# Altium PCB led.PcbDoc
Units mm, origin at the board's own origin, x right, y up, seen from the top; angles counter-clockwise.
Board outline 50 x 50 mm, 2 copper layers (Top Layer, Bottom Layer); 46 components, 67 nets, 189 pads, 19 vias.
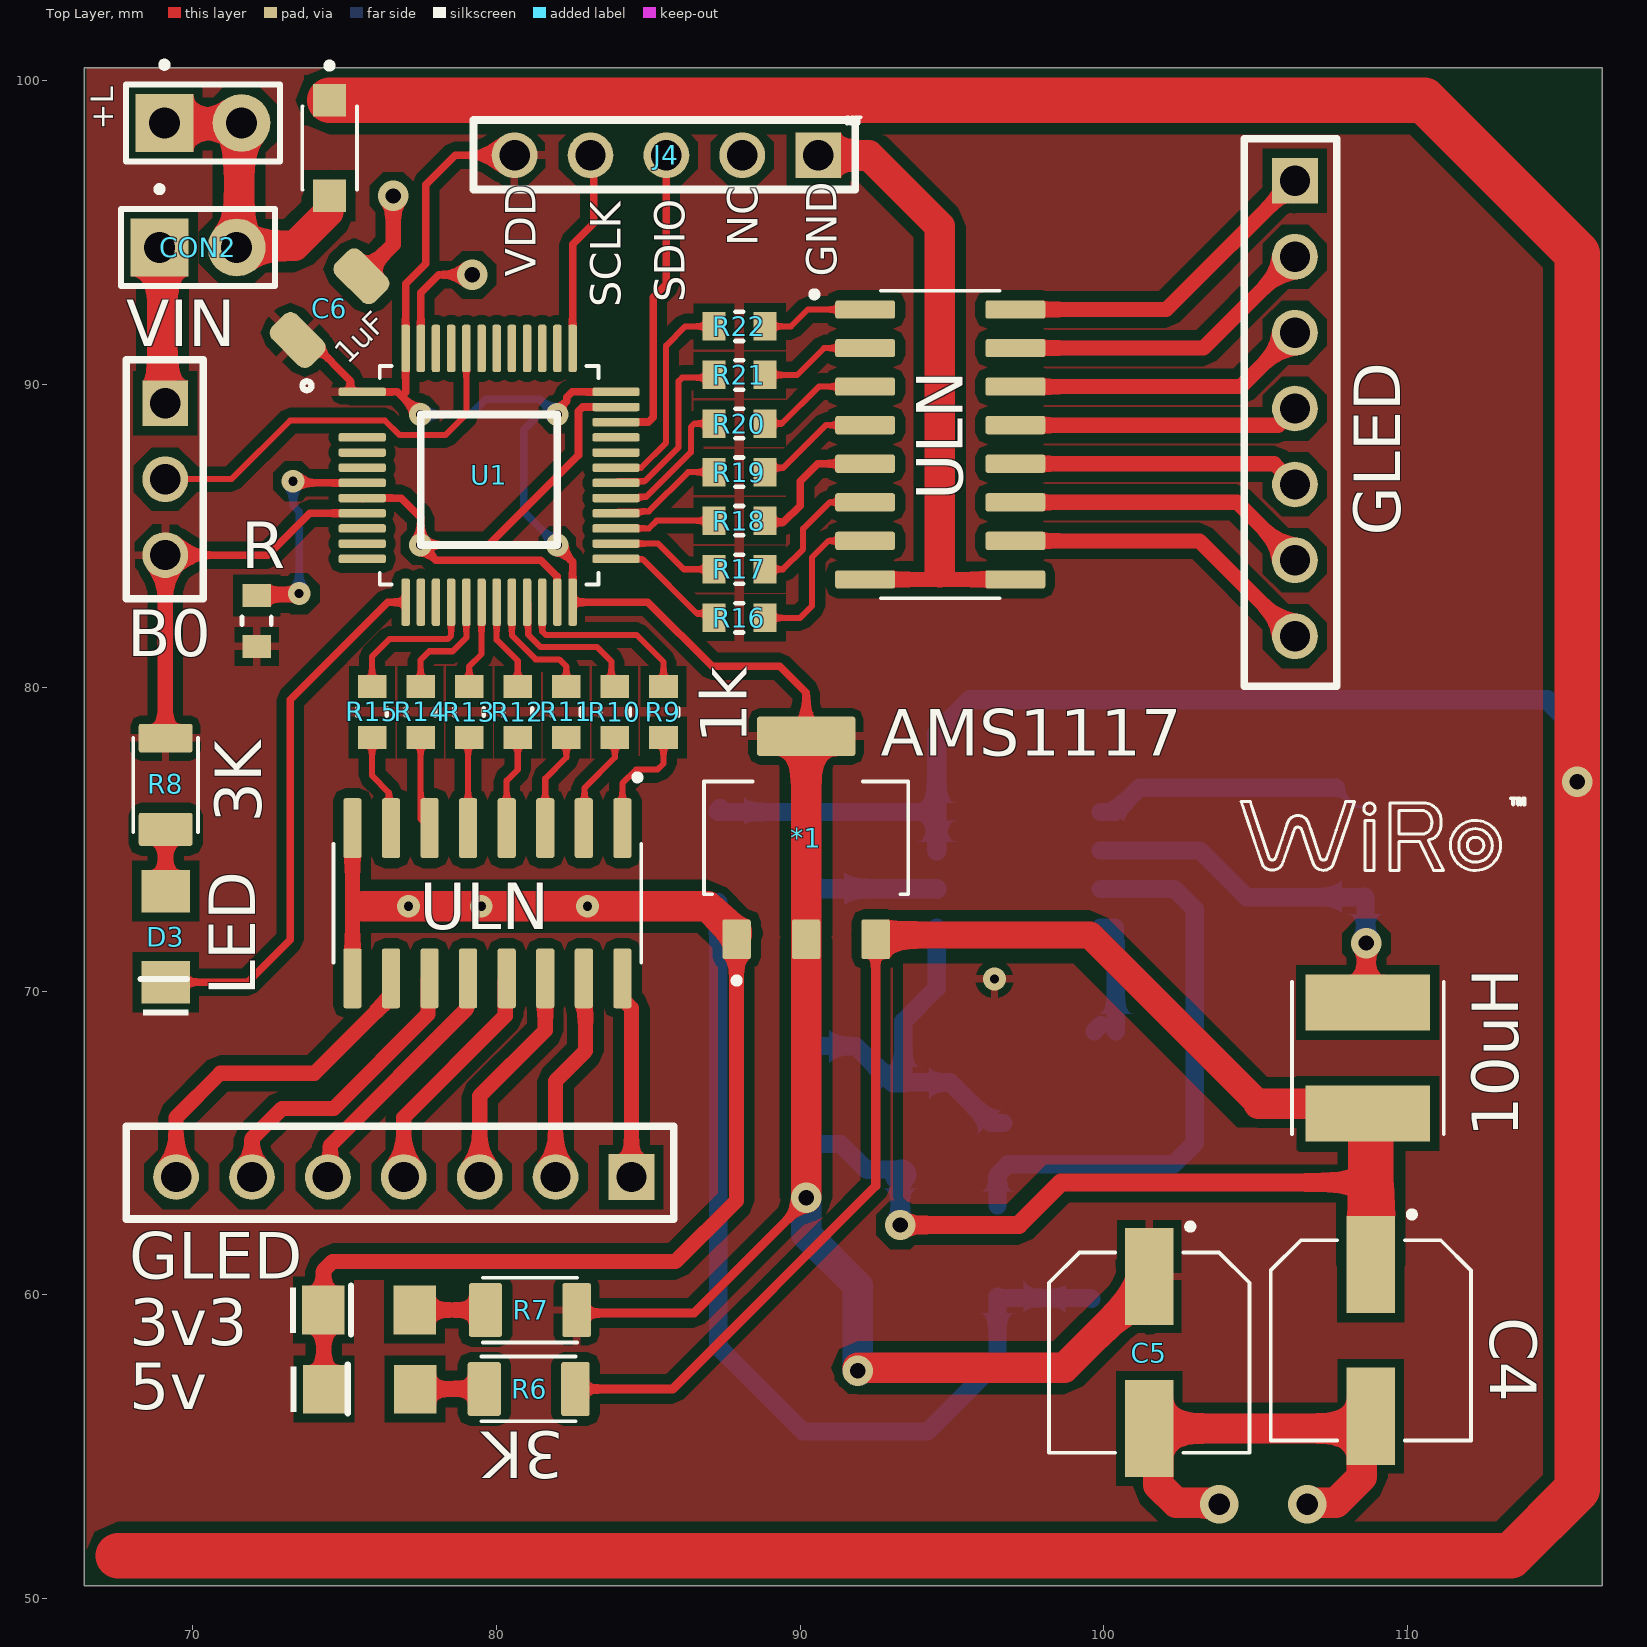
[diagram p0: Top Layer view]
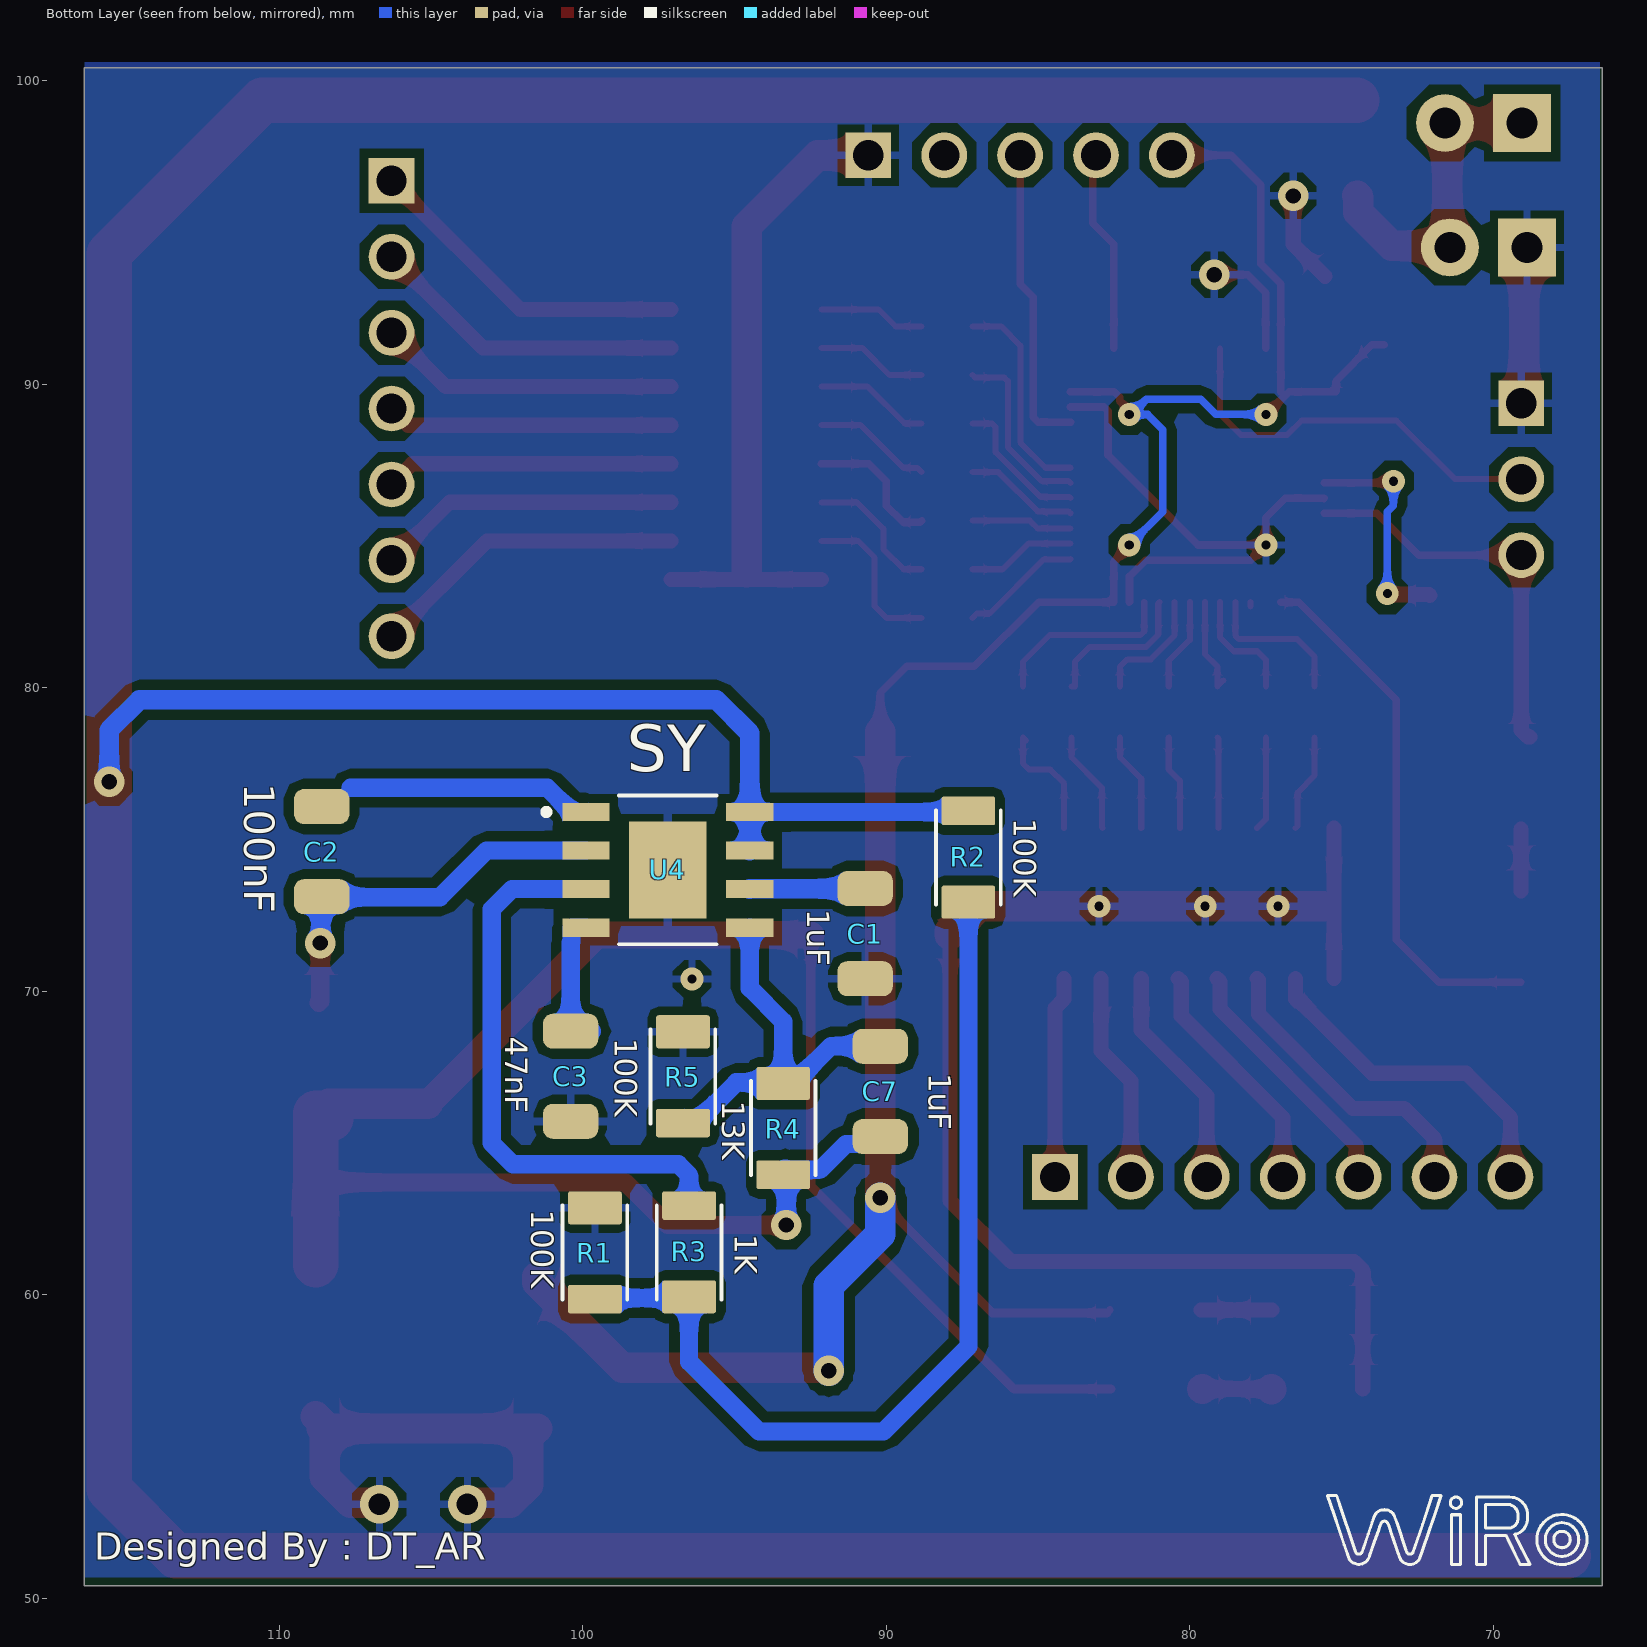
[diagram p1: Bottom Layer view, seen from below]
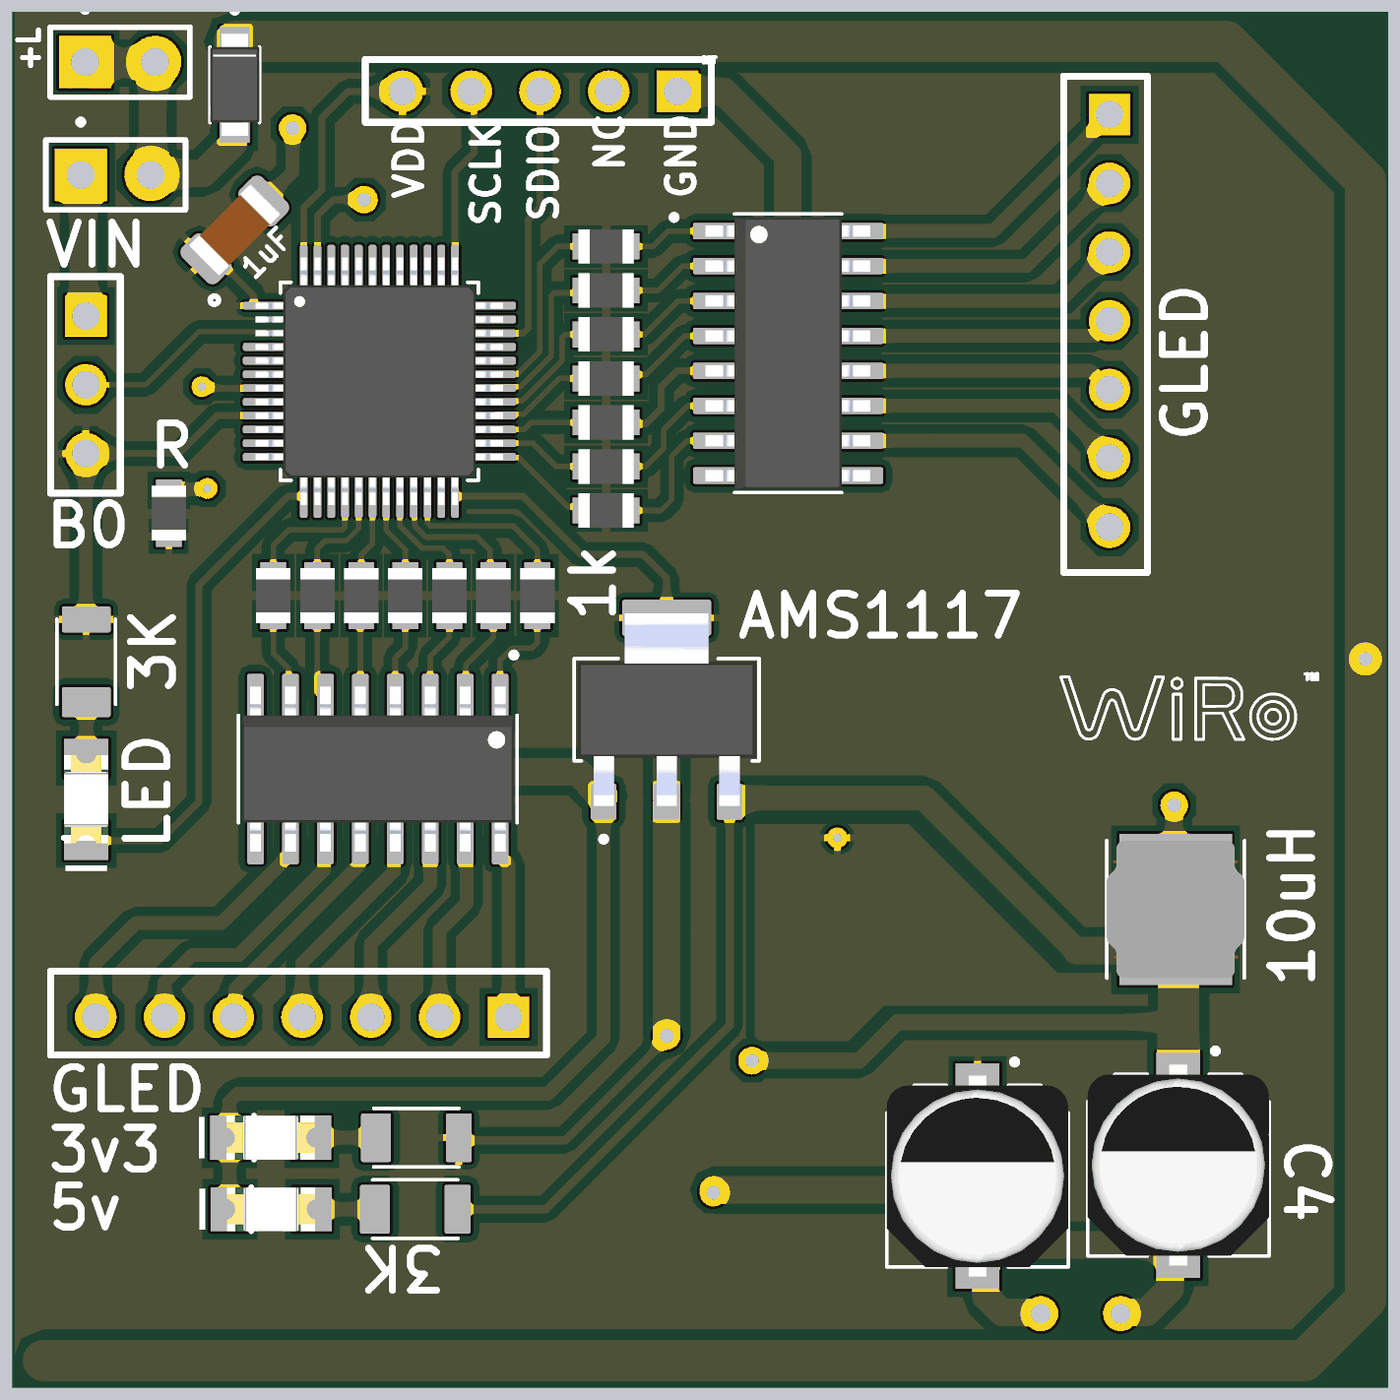
[diagram p2: 3D render of the assembled board from above, using the file's embedded part models]

## Layer stack, top to bottom
Top Solder: solder mask 0.0102, Solder Resist, Dk 3.5
Top Layer: signal copper 0.0356
Dielectric 1: dielectric 0.32, FR-4, Dk 4.8
Bottom Layer: signal copper 0.0356
Bottom Solder: solder mask 0.0102, Solder Resist, Dk 3.5

## Board outline
66.421,50.419 66.421,100.419 116.421,100.419 116.421,50.419

## Design rules (kind name [scope] priority, off if disabled: settings)
Clearance [All] p1: gap=0.2 ignorepadtopadclearanceinfootprint=FALSE
PolygonConnect [All] p1: connectstyle=Relief reliefconductorwidth=0.254 reliefentries=4 polygonreliefangle="90 Angle" airgapwidth=0.254
RoutingVias [All] p1: holewidth=0.711 width=1.27 viastyle="Through Hole" minholewidth=0.711 minwidth=1.27 maxholewidth=0.711 maxwidth=1.27
SolderMaskExpansion [All] p1: expansion=0.102 istentingtop=FALSE
Width [All] p1: maxlimit=1.5 minlimit=0.2 preferedwidth=0.25
30 further rules are at their usual default settings.

## Classes and differential pairs
component class Led: 3v3 5v 10uH *1 +L B0 C1 C2 C3 C4 C5 C6 CON2 D3 GLED J4 R R1 R2 R3 R4 R5 R6 R7 R8 R9 R10 R11 R12 R13 R14 R15 R16 R17 R18 R19 R20 R21 R22 U1 U4 ULN VIN

## Components (designator, comment, footprint, x,y, rotation, side; value= is the part's Value field where it differs from the comment)
3v3 "Super Red, 1.9V, 140°" WL-SMCW_1206_150120xx75000 75.8,59.5 r0 top (schematic designator D2)
5v "Super Red, 1.9V, 140°" WL-SMCW_1206_150120xx75000 75.819,56.896 r0 top (schematic designator D1)
10uH "Lout" IND_LQH5BPB100MT0L 108.7,67.8 r270 top (schematic designator L1)
*1 "AMS1117" SOT229P700X180-4N 90.2,75.055 r90 top
+L "CON?" PCBComponent_1#1 72.87,99.87 r180 top (schematic designator CON3)
B0 "Boot0" PCBComponent_1#2 69.088,86.868 r90 top (schematic designator J3)
C1 "Cvcc" CAP3216X125N 90.7,71.9 r270 bottom
C2 "Cbs" CAP3216X125N 108.6,74.6 r270 bottom
C3 "Css" CAP3216X125N 100.4,67.2 r270 bottom
C4 "cap3.3v" CAP_EEEFPA221XAL 108.8,58.5 r270 top
C5 "cap3.3v" CAP_EEEFPA221XAL 101.5,58.1 r270 top
C6 "Cm" CAP3216X125N 74.5,92.5 r45 top
C7 "CFB" CAP3216X125N 90.2,66.7 r90 bottom
CON2 "CON?" PCBComponent_1#1 72.71,95.77 r180 top
D3 "Super Red, 1.9V, 140°" WL-SMCW_1206_150120xx75000 69.1,71.8 r90 top
GLED "B7B-XH-A" PCBComponent_1#3 106.299,89.194 r90 top (schematic designator J1)
GLED "B7B-XH-A" PCBComponent_1#3 76.945,63.881 r0 top (schematic designator J2)
J4 "SWD" PCBComponent_1#4 85.595,97.536 r0 top
R "4-2176245-2" PCBComponent_1#5 72.1,82.2 r90 top (schematic designator R23)
R1 "4-2176245-2" RESC3115X65N 99.6,61.4 r270 bottom
R2 "4-2176245-2" RESC3115X65N 87.3,74.4 r90 bottom
R3 "4-2176245-2" RESC3115X65N 96.5,61.4 r90 bottom
R4 "Rfb" RESC3115X65N 93.4,65.5 r270 bottom
R5 "Rpd" RESC3115X65N 96.7,67.2 r270 bottom
R6 "Rled" RESC3115X65N 81.06,56.9 r0 top
R7 "Rled" RESC3115X65N 81.1,59.5 r0 top
R8 "4-2176245-2" RESC3115X65N 69.1,76.8 r90 top
R9 "4-2176245-2" PCBComponent_1#5 85.5,79.2 r90 top
R10 "4-2176245-2" PCBComponent_1#5 83.9,79.2 r90 top
R11 "4-2176245-2" PCBComponent_1#5 82.3,79.2 r90 top
R12 "4-2176245-2" PCBComponent_1#5 80.7,79.2 r90 top
R13 "4-2176245-2" PCBComponent_1#5 79.1,79.2 r90 top
R14 "4-2176245-2" PCBComponent_1#5 77.5,79.2 r90 top
R15 "4-2176245-2" PCBComponent_1#5 75.9,79.2 r90 top
R16 "4-2176245-2" PCBComponent_1#5 88,82.3 r180 top
R17 "4-2176245-2" PCBComponent_1#5 88,83.9 r180 top
R18 "4-2176245-2" PCBComponent_1#5 88,85.5 r180 top
R19 "4-2176245-2" PCBComponent_1#5 88,87.1 r180 top
R20 "4-2176245-2" PCBComponent_1#5 88,88.7 r180 top
R21 "4-2176245-2" PCBComponent_1#5 88,90.3 r180 top
R22 "4-2176245-2" PCBComponent_1#5 88,91.9 r180 top
U1 "STM32F103C8T6" QFP50P900X900X160-48N 79.756,86.995 r0 top
U4 "SY8205FCC" VREG_SY8205FCC 97.2,74 r180 bottom
ULN "ULN2003AD" SOIC127P600X175-16N 79.7,72.9 r270 top (schematic designator U3)
ULN "ULN2003AD" SOIC127P600X175-16N 94.615,88.011 r0 top (schematic designator U2)
VIN "SS34LW" SODFL3718X102N 74.5,97.775 r270 top (schematic designator D4)

## Footprints (in the part's own frame and the unit in brackets; to place one, negate y for a bottom-side part, rotate by r counter-clockwise, add the part's x,y. Pads: shape width x height; smd on the part's side, far side on the other; paste and mask are expansions set on the pad)
CAP3216X125N [mm]
  rrect54% 1.15x1.82 smd: 1(-1.485,0) 2(1.485,0)
  body extent -1.6,-0.8 1.6,0.8, height 1.8
CAP_EEEFPA221XAL [mm]
  rect 3.2x1.6 smd: 1(-2.5,0) 2(2.5,0)
  silkscreen extent -4.25,-3.3 3.3,3.3, body extent -3.65,-3.3 3.65,3.3, height 7.7
IND_LQH5BPB100MT0L [mm]
  rect 1.85x4.1 smd: 1(-1.825,0) 2(1.825,0)
  silkscreen extent -2.5,-2.5 2.5,2.5, body extent -2.5,-2.5 2.5,2.5, height 2.2
PCBComponent_1#1 [mm]
  rect 1.905x1.905 hole 1.02: 1(3.81,1.27)
  round 1.905 hole 1.02: 2(1.27,1.27)
  silkscreen extent 0,-0.75 5.08,2.54
PCBComponent_1#2 [mm]
  rect 1.508x1.508 / inner round 1.508 / far side rect 1.508x1.508 hole 1: 1(2.5,0)
  round 1.508 hole 1: 2(0,0) 3(-2.5,0)
  silkscreen extent -3.94,-1.25 3.94,1.29
PCBComponent_1#3 [mm]
  rect 1.508x1.508 / inner round 1.508 / far side rect 1.508x1.508 hole 1: 1(7.5,0)
  round 1.508 hole 1: 2(5,0) 3(2.5,0) 4(0,0) 5(-2.5,0) 6(-5,0) 7(-7.5,0)
  silkscreen extent -9.14,-1.38 8.89,1.67
PCBComponent_1#4 [mm]
  rect 1.508x1.508 / inner round 1.508 / far side rect 1.508x1.508 hole 1: 1(5,0)
  round 1.508 hole 1: 2(2.5,0) 3(0,0) 4(-2.5,0) 5(-5,0)
  silkscreen extent -6.35,-1.13 6.22,1.16
PCBComponent_1#5 [mm]
  rect 0.762x0.94 smd: 1(-0.838,0) 2(0.838,0)
  silkscreen extent -0.13,-0.48 0.13,0.48, body extent -1,-0.63 1,0.63, height 0.65
QFP50P900X900X160-48N [mm]
  rrect50% 1.56x0.28 smd: 1(-4.18,2.75) 4(-4.18,1.25) 5(-4.18,0.75) 6(-4.18,0.25) 7(-4.18,-0.25) 8(-4.18,-0.75) 9(-4.18,-1.25) 10(-4.18,-1.75) 11(-4.18,-2.25) 12(-4.18,-2.75) 25(4.18,-2.75) 26(4.18,-2.25) 27(4.18,-1.75) 28(4.18,-1.25) 29(4.18,-0.75) 30(4.18,-0.25) 31(4.18,0.25) 32(4.18,0.75) 33(4.18,1.25) 34(4.18,1.75) 35(4.18,2.25) 36(4.18,2.75)
  rrect50% 1.56x0.28 on Mech16: 2(-4.18,2.25) 3(-4.18,1.75)
  rrect50% 0.28x1.56 smd: 13(-2.75,-4.18) 14(-2.25,-4.18) 15(-1.75,-4.18) 16(-1.25,-4.18) 17(-0.75,-4.18) 18(-0.25,-4.18) 19(0.25,-4.18) 20(0.75,-4.18) 21(1.25,-4.18) 22(1.75,-4.18) 23(2.25,-4.18) 24(2.75,-4.18) 37(2.75,4.18) 38(2.25,4.18) 39(1.75,4.18) 40(1.25,4.18) 41(0.75,4.18) 42(0.25,4.18) 43(-0.25,4.18) 44(-0.75,4.18) 45(-1.25,4.18) 46(-1.75,4.18) 47(-2.25,4.18) 48(-2.75,4.18)
  silkscreen extent -6.15,-3.6 3.6,3.6, body extent -4.5,-4.5 4.5,4.5, height 1.6
RESC3115X65N [mm]
  rrect14% 1.09x1.77 smd: 1(-1.465,0)
  rrect14% 0.94x1.77 smd: 2(1.54,0)
  silkscreen extent -1.55,-1.06 1.55,1.06
SODFL3718X102N [mm]
  rect 1.08x1.09 smd: A(1.575,0) C(-1.575,0)
  silkscreen extent -2.81,-0.9 1.38,0.9, body extent -1.85,-0.9 1.85,0.9, height 1.02
SOIC127P600X175-16N [mm]
  rrect25% 1.97x0.6 smd: 1(-2.475,4.445) 2(-2.475,3.175) 3(-2.475,1.905) 4(-2.475,0.635) 5(-2.475,-0.635) 6(-2.475,-1.905) 7(-2.475,-3.175) 8(-2.475,-4.445) 9(2.475,-4.445) 10(2.475,-3.175) 11(2.475,-1.905) 12(2.475,-0.635) 13(2.475,0.635) 14(2.475,1.905) 15(2.475,3.175) 16(2.475,4.445)
  silkscreen extent -4.24,-5.06 1.95,5.06, body extent -3,-4.95 3,4.95, height 1.75
SOT229P700X180-4N [mm]
  rrect15% 1.31x0.93 smd: 1(-3.345,2.29) 2(-3.345,0) 3(-3.345,-2.29)
  rrect15% 1.31x3.24 smd: 4(3.345,0)
  silkscreen extent -4.8,-3.36 1.86,3.36, body extent -3.5,-3.25 3.5,3.25, height 1.8
VREG_SY8205FCC [mm]
  rect 1.55x0.6 smd: 1(-2.7,1.905) 2(-2.7,0.635) 3(-2.7,-0.635) 4(-2.7,-1.905) 5(2.7,-1.905) 6(2.7,-0.635) 7(2.7,0.635) 8(2.7,1.905)
  rect 2.55x3.2 smd paste-3: 9(0,0)
  silkscreen extent -4.1,-2.45 1.61,2.45
WL-SMCW_1206_150120xx75000 [mm] "SMD Mono-color Chip LED, body 3.2x1.6mm"
  rect 1.4x1.6 smd: 1(-1.5,0) 2(1.5,0)
  silkscreen extent -2.6,-0.75 -2.4,0.75, body extent -1.6,-0.8 1.6,0.8, height 0.68

## Part data
3v3 5v D3: library part 150120SS75000, "WL-SMCW Mono-color Chip LED Waterclear, SMT, size 1206, Super Red, 1.9V, 140°", Case/Size Code=1206, Emitting Color="Super Red", Forward Voltage=1.9V, Manufacturer="Wurth Elektronik", Operating Temperature Max=85°C, Operating Temperature Min=-40°C, Category="Signal LEDs", Chip Technology=AlInGaP, ComponentLink1Description="Website Link", ComponentLink1URL=https://www.we-online.com/redexpert/article/150120SS75000?ad, ComponentLink2Description="Datasheet Link", ComponentLink2URL=https://www.we-online.com/redexpert/spec/150120SS75000?ad, Dominant Wavelength=630nm, Height=0.68mm, Length=3.2mm, Luminous Intensity=60mcd, Manufacturer Part Number=150120SS75000, Match Code=WL-SMCW, Mount="Surface Mount", Packaging="Tape and Reel", Peak Wavelength=645nm, Viewing Angle=140°, Width=1.6mm
10uH: library part LQH5BPB100MT0L, "Inductor with Inductance: 10uH Tol. +/-20%, Package: 2020 (5050)", Package=NONSTANDARD, Check_prices=https://www.snapeda.com/parts/LQH5BPB100MT0L/Murata/view-part/4547622/?ref=eda, Digi-Key_Part_Number=490-9930-1-ND, MF=Murata, MP=LQH5BPB100MT0L, Purchase-URL=https://pricing.snapeda.com/search/part/LQH5BPB100MT0L/?ref=eda, SnapEDA_Link=https://www.snapeda.com/parts/LQH5BPB100MT0L/Murata/view-part/4547622/?ref=snap
B0: library part B3B-XH-A, "Connector Header Through Hole 3 position 0.098 (2.50mm)", Package=None, Check_prices=https://www.snapeda.com/parts/B3B-XH-A/JST+Sales+America+Inc./view-part/?ref=eda, MF="JST Sales", MP=B3B-XH-A, SnapEDA_Link=https://www.snapeda.com/parts/B3B-XH-A/JST+Sales+America+Inc./view-part/?ref=snap
C1: library part GRM31CR71H475KA12L, "1uF", Package=None, Availability=Unavailable, MP=GRM31CR71H475KA12L, Price=None
C2: library part GRM31CR71H475KA12L, "100nF", Package=None, Availability=Unavailable, MP=GRM31CR71H475KA12L, Price=None
C3: library part GRM31CR71H475KA12L, "47nF", Package=None, Availability=Unavailable, MP=GRM31CR71H475KA12L, Price=None
C4 C5: library part EEEFPA221XAL, "Aluminum Electrolytic Capacitors - SMD 10VDC 220uF 20% 6x8mm AEC-Q200", Package="RADIAL-2 Panasonic", Availability="In Stock", Check_prices=https://www.snapeda.com/parts/EEE-FPA221XAL/Panasonic/view-part/6178333/?ref=eda, MF=Panasonic, MP=EEE-FPA221XAL, Price=None, Purchase-URL=https://pricing.snapeda.com/search/part/EEE-FPA221XAL/?ref=eda, SnapEDA_Link=https://www.snapeda.com/parts/EEE-FPA221XAL/Panasonic/view-part/6178333/?ref=snap
C6: library part GRM31CR71H475KA12L, "CAP 4.7UF 50VDC X7R 10% SMD 1206", Package=None, Availability=Unavailable, MP=GRM31CR71H475KA12L, Price=None
C7: library part GRM31CR71H475KA12L, "OPTIONAL 1uF", Package=None, Availability=Unavailable, MP=GRM31CR71H475KA12L, Price=None
GLED GLED: "Connector Header Through Hole 7 position 0.098 (2.50mm)", Package=None, Check_prices=https://www.snapeda.com/parts/B7B-XH-A/JST+Sales+America+Inc./view-part/?ref=eda, MF="JST Sales", MP=B7B-XH-A, SnapEDA_Link=https://www.snapeda.com/parts/B7B-XH-A/JST+Sales+America+Inc./view-part/?ref=snap
J4: library part B5B-XH-A, "Connector Header Through Hole 5 position 0.098 (2.50mm)", Package=None, Check_prices=https://www.snapeda.com/parts/B5B-XH-A/JST+Sales+America+Inc./view-part/?ref=eda, MF="JST Sales", MP=B5B-XH-A, SnapEDA_Link=https://www.snapeda.com/parts/B5B-XH-A/JST+Sales+America+Inc./view-part/?ref=snap
R R8 R9 R10 R11 R12 R13 R14 R15 R16 R17 R18 R19 R20 R21 R22: "CRGS1206 5% 2K7", Package=None, Availability=Unavailable, MP=4-2176245-2, Price=None
R1 R2: "100K", Package=None, Availability=Unavailable, MP=4-2176245-2, Price=None
R3: "1K", Package=None, Availability=Unavailable, MP=4-2176245-2, Price=None
R4 R6 R7: library part 4-2176245-2, "CRGS1206 5% 2K7", Package=None, Availability=Unavailable, MP=4-2176245-2, Price=None
R5: library part 4-2176245-2, Package=None, Availability=Unavailable, MP=4-2176245-2, Price=None
U1: "ARM® Cortex®-M3 STM32F1 Microcontroller IC 32-Bit 72MHz 64KB (64K x 8) FLASH 48-LQFP (7x7)", Package="LQFP-48 STMicroelectronics", Check_prices=https://www.snapeda.com/parts/STM32F103C8T6/STMicroelectronics/view-part/?ref=eda, MF=STMicroelectronics, MP=STM32F103C8T6, SnapEDA_Link=https://www.snapeda.com/parts/STM32F103C8T6/STMicroelectronics/view-part/?ref=snap
U4: "High-Efficiency Fast Responseï¼Œ5A, 30V Input Synchronous Step Down Regulator", Package=Package, Check_prices=https://www.snapeda.com/parts/SY8205FCC/Silergy/view-part/?ref=eda, MF=Silergy, MP=SY8205FCC, SnapEDA_Link=https://www.snapeda.com/parts/SY8205FCC/Silergy/view-part/?ref=snap
ULN ULN: "50-V, 7-ch darlington transistor array, -20C to 70C", Package="SOIC-16 Texas Instruments", Availability="In Stock", Check_prices=https://www.snapeda.com/parts/ULN2003AD/Texas+Instruments/view-part/?ref=eda, MF="Texas Instruments", MP=ULN2003AD, Price=None, Purchase-URL=https://pricing.snapeda.com/search/part/ULN2003AD/?ref=eda, SnapEDA_Link=https://www.snapeda.com/parts/ULN2003AD/Texas+Instruments/view-part/?ref=snap
VIN: "3A, 40V, Schottky Rectifier", Package="SOD-123W-2 Taiwan Semiconductor", Availability="In Stock", Check_prices=https://www.snapeda.com/parts/SS34LW/Taiwan+Semiconductor/view-part/?ref=eda, MF="Taiwan Semiconductor", MP=SS34LW, Price=None, Purchase-URL=https://pricing.snapeda.com/search/part/SS34LW/?ref=eda, SnapEDA_Link=https://www.snapeda.com/parts/SS34LW/Taiwan+Semiconductor/view-part/?ref=snap

## Via types
v1: diameter 0.75, hole 0.3, Top Layer to Bottom Layer, 10 vias
v2: diameter 1, hole 0.5, Top Layer to Bottom Layer, 7 vias
v3: diameter 1.27, hole 0.711, Top Layer to Bottom Layer, 2 vias

## Nets (pads, with @x,y where several pads share a name; then routed paths per layer and width w, separated by ;. In a path a pad name is that pad's centre, name@x,y a point inside that pad or via, vN(x,y) a via of type N, cw(c..) or ccw(c..) an arc to the next point about the centre after c; other vN are vias at no path point)
GND: 3v3.1 5v.1 *1.1 B0.1 C1.2 C3.2 C4.2 C5.2 C6.2 CON2.1 J4.1 R1.1 R5.1 U1.8 U1.23 U1.35 U1.47 U4.9 ULN.8 ULN.9 | length 112.2
  Top Layer w0.25: U1.8@75.591,86.23 U1.8 76.855,86.245 77.5,85.6 v1(77.5,84.7) ; U1.47 77.506,93.006 78.1,93.6 v2(79.2,93.6) ; U1.23 81.991,82.83 81.991,83.669 81.46,84.2 78,84.2 v1(77.5,84.7) ; U1.35 82.846,89.245 82.7,89.099 82.7,87.658 79.742,84.7 v1(77.5,84.7)
  Top Layer w0.5: 5v.1 74.31,56.905 74.31,59.491 3v3.1 74.3,60.8 74.6,61.1 85.9,61.1 87.9,63.1 87.9,71.845 *1.1@87.91,71.855 ; ULN.9@75.255,70.425 ULN.8@75.255,75.375 ; C6.2 76.6,94.6 v2(76.6,96.2) ; ULN.8@92.14,83.566 ULN.9@97.09,83.566
  Top Layer w1: CON2.1 68.994,94.406 68.994,89.462 B0.1 ; 75.6,72.8 86.965,72.8 87.755,72.01 87.875,72.01 87.91,71.975 *1.1@87.91,71.855 ; J4.1 92.264,97.536 94.6,95.2 94.6,83.8 ; v3(103.8,53.1) 103.748,53.152 102.386,53.152 101.8,53.737 101.8,55.3 C5.2 C4.2@108.6,55.6 ; v3(106.7,53.1) 106.752,53.152 107.652,53.152 108.5,54 108.5,55.7 C4.2
  Bottom Layer w0.5: v2(76.6,96.2) v2@76.6,96.335
  other v1: 96.4,70.4 77.1,72.8 79.5,72.8 83,72.8
Net*1_2: *1.2 *1.4 B0.3 C5.1 C6.1 J4.5 R7.2 R8.2 R.1 U1.1 U1.9 U1.24 U1.36 U1.48 | length 95.6
  Top Layer w0.25: B0.3 72.468,84.368 73.845,85.745 U1.9 ; C6.1@73.609,91.291 74.009,91.291 75.186,90.114 75.186,89.76 75.201,89.745 U1.1 76.731,89.745 77.476,89 v1(77.5,89) ; 77.006,89.729 77.006,93.306 77.669,93.969 77.669,96.569 78.636,97.536 J4.5 ; v1(82,84.7) 82,84.651 82.506,84.145 U1.24 84.985,82.815 87.1,80.7 89.33,80.7 90.2,79.83 *1.4@90.2,78.545 ; v1(82,89) 82,89.135 82.316,89.451 82.316,89.568 82.492,89.745 U1.36 ; R7.2 R7.2@82.74,59.4
  Top Layer w0.3: R7.2@82.74,59.4 86.5,59.4 90.2,63.1 v2(90.2,63.2)
  Top Layer w0.5: R8.2@68.802,78.375 68.868,78.375 69.088,78.595 B0.3
  Top Layer w1: v2(90.2,63.2) *1.2@90.2,71.7 ; *1.2@90.2,71.855 *1.4@90.2,78.545 ; v2@91.896,57.6 98.7,57.6 101.5,60.4 C5.1
  Bottom Layer w0.25: v1(77.5,89) 79.151,89 79.648,89.496 81.436,89.496 v1@81.932,89 ; v1(82,84.7) 80.9,85.8 80.9,88.5 81.4,89 v1(82,89)
  Bottom Layer w1: v2(90.2,63.2) 90.2,62 91.9,60.3 v2(91.9,57.5)
Net*1_3: 10uH.2 *1.3 C4.1 C7.1 R4.2 R6.2 | length 66.5
  Top Layer w0.3: R6.2 85.8,56.9 92.49,63.59 *1.3@92.49,71.855
  Top Layer w0.6: v2(93.3,62.3) 97.2,62.3 98.6,63.7 108.8,63.7
  Top Layer w0.9: *1.3@92.49,71.855 99.545,71.855 105.1,66.3
  Top Layer w1: 105.1,66.3 108.375,66.3 10uH.2
  Top Layer w1.5: 10uH.2@108.3,65.8 108.475,65.975 10uH.2 ; C4.1 108.8,63.7 10uH.2@108.8,65.975
  Bottom Layer w0.6: C7.1 90.444,64.971 91.332,64.971 92.177,64.126 93.164,64.126 93.33,63.96 R4.2 ; v2(93.3,62.3) R4.2@93.3,63.93
  Bottom Layer w1: R4.2@93.3,63.93 R4.2@93.33,63.96
NetC1_1: C1.1 U4.6 | length 3.8
  Bottom Layer w0.65: C1.1 90.71,73.375 94.49,73.375 U4.6
NetC2_1: C2.1 U4.1 | length 9.3
  Bottom Layer w0.1: 107.644,76.7 108.259,76.085 C2.1
  Bottom Layer w0.6: U4.1 100.375,75.905 101.17,76.7 107.644,76.7
NetC2_2: 10uH.1 C2.2 U4.2 | length 12.8
  Top Layer w0.6: v2(108.651,71.586) 108.651,69.674 10uH.1
  Bottom Layer w0.6: U4.2 103.165,74.635 104.7,73.1 C2.2@108.58,73.1 ; C2.2 108.625,73.09 108.625,71.612 v2(108.651,71.586)
NetC3_1: C3.1 U4.4 | length 4.2
  Bottom Layer w0.6: C3.1@99.7,68.685 C3.1@99.9,68.885 ; U4.4 100.375,72.095 100.375,71.62 100.4,71.595 C3.1
NetCON2_2: +L.1 +L.2 CON2.2 VIN.A | length 10.7
  Top Layer w1: +L.1 69.093,98.567 +L.2@71.567,98.567 ; +L.2 +L.2@71.567,98.567 ; VIN.A 74.495,96.2 74.455,96.16 74.455,95.655 73.357,94.557 71.497,94.557 CON2.2 71.52,94.58 71.52,98.52 +L.2@71.567,98.567
NetD1_2: 5v.2 R6.1 | length 2.3
  Top Layer w0.5: 5v.2@77.321,56.898 R6.1@79.593,56.898
  Top Layer w1: 5v.2 5v.2@77.321,56.898 ; R6.1@79.593,56.898 R6.1
NetD2_2: 3v3.2 R7.1 | length 2.3
  Top Layer w0.5: 3v3.2 R7.1
NetD3_1: D3.1 U1.13 | length 17.7
  Top Layer w0.25: D3.1 71.8,70.3 73.2,71.7 73.2,79.6 76.415,82.815 U1.13
NetD3_2: D3.2 R8.1 | length 2
  Top Layer w0.5: D3.2 R8.1
NetD4_C: R2.2 U4.7 U4.8 VIN.C | length 167.6
  Top Layer w1.5: 67.546,51.4 113.4,51.4 115.6,53.6 v2(115.6,76.9) 115.6,94.3 110.55,99.35 VIN.C
  Bottom Layer w0.6: R2.2@87.365,75.905 U4.8
  Bottom Layer w0.65: R2.2 R2.2@87.365,76.005 ; U4.7 U4.8 94.5,78.5 95.6,79.6 114.6,79.6 115.6,78.6 v2(115.6,76.9)
NetJ1_1: GLED.1@106.299,96.694 ULN.16@97.09,92.456 | length 11
  Top Layer w0.5: ULN.16@97.09,92.456 102.061,92.456 GLED.1@106.299,96.694
NetJ1_2: GLED.2@106.299,94.194 ULN.15@97.09,91.186 | length 10.5
  Top Layer w0.5: ULN.15@97.09,91.186 103.291,91.186 GLED.2@106.299,94.194
NetJ1_3: GLED.3@106.299,91.694 ULN.14@97.09,89.916 | length 9.9
  Top Layer w0.5: ULN.14@97.09,89.916 104.521,89.916 GLED.3@106.299,91.694
NetJ1_4: GLED.4@106.299,89.194 ULN.13@97.09,88.646 | length 9.4
  Top Layer w0.5: ULN.13@97.09,88.646 105.751,88.646 GLED.4@106.299,89.194
NetJ1_5: GLED.5@106.299,86.694 ULN.12@97.09,87.376 | length 9.5
  Top Layer w0.5: ULN.12@97.09,87.376 105.617,87.376 GLED.5@106.299,86.694
NetJ1_6: GLED.6@106.299,84.194 ULN.11@97.09,86.106 | length 10
  Top Layer w0.5: ULN.11@97.09,86.106 104.387,86.106 GLED.6@106.299,84.194
NetJ1_7: GLED.7@106.299,81.694 ULN.10@97.09,84.836 | length 10.5
  Top Layer w0.5: ULN.10@97.09,84.836 103.157,84.836 GLED.7@106.299,81.694
NetJ2_1: GLED.1@84.445,63.881 ULN.16@84.145,70.425 | length 6.7
  Top Layer w0.5: ULN.16@84.145,70.425 84.145,69.74 84.445,69.44 GLED.1@84.445,63.881
NetJ2_2: GLED.2@81.945,63.881 ULN.15@82.875,70.425 | length 7
  Top Layer w0.5: GLED.2@81.945,63.881 81.945,67.045 82.931,68.031 ULN.15@82.931,70.425
NetJ2_3: GLED.3@79.445,63.881 ULN.14@81.605,70.425 | length 7.4
  Top Layer w0.5: GLED.3@79.445,63.881 79.445,66.545 81.605,68.705 ULN.14@81.605,70.425
NetJ2_4: GLED.4@76.945,63.881 ULN.13@80.335,70.425 | length 8
  Top Layer w0.5: GLED.4@76.945,63.881 76.945,65.845 80.285,69.185 80.285,70.325 ULN.13@80.385,70.425
NetJ2_5: GLED.5@74.445,63.881 ULN.12@79.065,70.425 | length 8.5
  Top Layer w0.5: GLED.5@74.445,63.881 74.526,63.962 74.526,64.926 79.015,69.415 79.015,70.325 ULN.12@79.115,70.425
NetJ2_6: GLED.6@71.945,63.881 ULN.11@77.795,70.425 | length 10
  Top Layer w0.5: GLED.6@71.945,63.881 71.945,65.145 72.939,66.139 74.639,66.139 77.745,69.245 77.745,70.375 ULN.11@77.795,70.425
NetJ2_7: GLED.7@69.445,63.881 ULN.10@76.525,70.425 | length 11.3
  Top Layer w0.5: GLED.7@69.445,63.881 69.445,65.845 70.9,67.3 74.007,67.3 76.005,69.298 76.005,69.305 76.39,69.69 76.475,69.69 76.525,69.74 ULN.10@76.525,70.425
NetJ3_2: B0.2 U1.44 | length 13.4
  Top Layer w0.2: B0.2 71.268,86.868 73.2,88.8 76.324,88.8 76.799,88.325 78.325,88.325 79.006,89.006 U1.44
NetJ4_3: J4.3 U1.34 | length 10.1
  Top Layer w0.25: U1.34 84.992,88.745 85.162,88.915 85.162,92.862 85.595,93.296 J4.3
NetJ4_4: J4.4 U1.37 | length 6.7
  Top Layer w0.25: U1.37 82.506,94.606 83.2,95.3 83.2,97.431 J4.4
NetR1_2: R1.2 R2.1 R3.1 | length 31.2
  Bottom Layer w0.6: R2.1 87.3,58.3 90.1,55.5 94.2,55.5 96.5,57.8 R3.1 96.538,59.898 99.563,59.898 R1.2
NetR3_2: R3.2 U4.3 | length 19
  Bottom Layer w0.6: R3.2 96.5,63.949 96.851,64.3 102.3,64.3 103,65 103,72.7 102.335,73.365 U4.3
NetR4_1: C7.2 R4.1 R5.2 U4.5 | length 13.2
  Bottom Layer w0.6: C7.2 90.215,68.2 91.825,68.2 93.06,66.965 R4.1 R4.1@93.4,67 ; U4.5 94.5,70.1 93.4,69 R4.1@93.4,67 ; R5.2 96.285,65.66 94.945,67 R4.1@93.4,67
NetR9_1: R9.1 ULN.1@84.145,75.375 | length 4.1
  Top Layer w0.2: ULN.1@84.145,75.375 84.145,76.845 84.6,77.3 85.3,77.3 85.5,77.5 R9.1 R9.1@85.398,78.26
NetR9_2: R9.2 U1.22 | length 6.2
  Top Layer w0.2: U1.22 81.506,81.852 81.623,81.735 84.616,81.735 85.5,80.851 R9.2
NetR10_1: R10.1 ULN.2@82.875,75.375 | length 3.4
  Top Layer w0.2: ULN.2@82.875,75.375 82.9,75.4 82.9,76.7 83.9,77.7 R10.1
NetR10_2: R10.2 U1.21 | length 5.1
  Top Layer w0.2: U1.21 81.046,82.775 81.046,81.746 81.457,81.335 83.313,81.335 83.783,80.865 83.783,80.038 R10.2
NetR11_1: R11.1 ULN.3@81.605,75.375 | length 3.3
  Top Layer w0.2: ULN.3@81.605,75.375 81.605,77.005 82.3,77.7 R11.1
NetR11_2: R11.2 U1.20 | length 4
  Top Layer w0.2: U1.20 80.506,81.721 81.292,80.935 82.065,80.935 82.3,80.7 R11.2
NetR12_1: R12.1 ULN.4@80.335,75.375 | length 3.1
  Top Layer w0.2: ULN.4@80.335,75.375 80.335,76.935 80.7,77.3 R12.1
NetR12_2: R12.2 U1.19 | length 3.1
  Top Layer w0.2: U1.19 80.006,81.574 80.7,80.88 R12.2
NetR13_1: R13.1 ULN.5@79.065,75.375 | length 3
  Top Layer w0.2: ULN.5@79.065,75.375 79.065,78.327 R13.1
NetR13_2: R13.2 U1.18 | length 3.2
  Top Layer w0.2: R13.2@78.9,80.238 R13.2 79.1,80.7 79.506,81.106 U1.18
NetR14_1: R14.1 ULN.6@77.795,75.375 | length 3.1
  Top Layer w0.2: R14.1 77.5,75.67 ULN.6@77.795,75.375
NetR14_2: R14.2 U1.17 | length 3.9
  Top Layer w0.2: R14.2 77.5,80.916 77.784,81.2 78.555,81.2 79.006,81.651 U1.17
NetR15_1: R15.1 ULN.7@76.525,75.375 | length 3.2
  Top Layer w0.2: R15.1 75.9,77.1 76.457,76.543 76.457,75.443 ULN.7@76.525,75.375
NetR15_2: R15.2 U1.16 | length 5
  Top Layer w0.2: R15.2 75.9,81.031 76.469,81.6 78.389,81.6 78.506,81.717 U1.16
NetR16_1: R16.1 ULN.7@92.14,84.836 | length 5.3
  Top Layer w0.2: R16.1 90,82.3 90.387,82.687 90.387,84.287 90.936,84.836 ULN.7@92.14,84.836
NetR16_2: R16.2 U1.25 | length 4
  Top Layer w0.2: U1.25 83.957,84.224 84.818,84.224 86.598,82.444 87.018,82.444 R16.2
NetR17_1: R17.1 ULN.6@92.14,86.106 | length 4.6
  Top Layer w0.2: R17.1 89.434,83.9 90.1,84.566 90.1,85.234 90.972,86.106 ULN.6@92.14,86.106
NetR17_2: R17.2 U1.26 | length 3.6
  Top Layer w0.2: U1.26 85.326,84.745 86.171,83.9 R17.2
NetR18_1: R18.1 ULN.5@92.14,87.376 | length 4.6
  Top Layer w0.25: R18.1 88.89,85.448 89.448,85.448 90,86 90,86.8 90.576,87.376 ULN.5@92.14,87.376
NetR18_2: R18.2 U1.27 | length 3.3
  Top Layer w0.2: U1.27 85.022,85.245 85.277,85.5 R18.2
NetR19_1: R19.1 ULN.4@92.14,88.646 | length 3.9
  Top Layer w0.2: R19.1 88.977,87.239 89.439,87.239 90.846,88.646 ULN.4@92.14,88.646
NetR19_2: R19.2 U1.28 | length 3.8
  Top Layer w0.2: U1.28 83.996,85.805 85.016,85.805 86.311,87.1 R19.2
NetR20_1: R20.1 ULN.3@92.14,89.916 | length 3.8
  Top Layer w0.2: R20.1 88.84,88.702 89.402,88.702 90.616,89.916 ULN.3@92.14,89.916
NetR20_2: R20.2 U1.29 | length 4.7
  Top Layer w0.2: U1.29 83.976,86.285 84.931,86.285 86.4,87.754 86.4,88.583 86.517,88.7 R20.2
NetR21_1: R21.1 ULN.2@92.14,91.186 | length 3.7
  Top Layer w0.2: R21.1 89.9,90.3 90.786,91.186 ULN.2@92.14,91.186
NetR21_2: R21.2 U1.30 | length 6
  Top Layer w0.2: U1.30 83.996,86.805 84.885,86.805 86,87.92 86,90.094 86.117,90.211 87.073,90.211 R21.2
NetR22_1: R22.1 ULN.1@92.14,92.456 | length 3.5
  Top Layer w0.2: R22.1 89.7,91.9 90.256,92.456 ULN.1@92.14,92.456
NetR22_2: R22.2 U1.31 | length 7
  Top Layer w0.2: U1.31 84.759,87.245 85.587,88.072 85.587,91.27 86.217,91.9 R22.2
NetR23_2: R.2 U1.7 | length 7.5
  Top Layer w0.25: v1(73.3,86.8) 73.355,86.745 U1.7
  Top Layer w0.5: R.2 72.131,83.069 73.469,83.069 v1(73.5,83.1)
  Bottom Layer w0.25: v1(73.3,86.8) 73.3,86 73.5,85.8 v1(73.5,83.1)
NetU1_7: 
NetU1_14: U1.14
NetU1_15: U1.15 | length 0.1
  Top Layer w0.2: U1.15 78.006,82.685 U1.15@78.013,82.677
NetU1_32: U1.32
NetU1_33: U1.33
pads on no net: J4.2 U1.2 U1.3 U1.4 U1.5 U1.6 U1.10 U1.11 U1.12 U1.38 U1.39 U1.40 U1.41 U1.42 U1.43 U1.45 U1.46

## Polygon pours and split planes (outlines as drawn)
GND on Top Layer "GND_L01_P002" (solid, remove dead copper, pour order 2): 93.4,70.9 99,70.9 104.4,65.5 106.4,65.5 106.4,64.7 107.7,64.7 107.7,64.3 98.1,64.3 96.8,63 93.6,63 93.4,63.2
Net*1_2 on Top Layer "NET*1_2_L01_P001" (solid, remove dead copper, pour order 1): 66.5,100.34 66.5,100.1 66.5,50.5 116.4,50.5 116.4,100.419 66.5,100.419
GND on Bottom Layer "GND_L02_P004" (solid, remove dead copper, pour order 4): 66.5,100.6 116.4,100.6 116.4,50.7 66.5,50.7

## Silkscreen, mask and mechanical layers (free items; w line width, h text height)
Top Overlay:
  drawing of 512 lines, arcs and shapes, not listed
  text "NC" at 88.6,94.533 h1 r90
  text "VDD" at 81.3,93.533 h1 r90
  text "GND" at 91.2,93.533 h1 r90
  text "SDIO" at 86.2,92.7 h1 r90
  text "SCLK" at 84.1,92.533 h1 r90
  text "1uF" at 75.1,90.612 h0.75 r45
  text "1k" at 88.246,78.154 h1.52 r90
  text "AMS1117" at 92.654,77.754 h1.52
  text "3K" at 72.246,75.554 h1.52 r90
  text "LED" at 72.046,69.854 h1.52 r90
  text "3K" at 82.214,55.494 h1.52 r180
Bottom Overlay:
  drawing of 389 lines, arcs and shapes, not listed
  text "SY" at 98.546,77.254 h1.52
  text "100nF" at 111.15,76.85 h1 r90
  text "100K" at 85.8,75.7 h0.75 r90
  text "1uF" at 92.6,72.7 h0.75 r90
  text "47nF" at 102.55,68.5 h0.75 r90
  text "100K" at 98.95,68.45 h0.75 r90
  text "1uF" at 88.6,67.3 h0.75 r90
  text "13K" at 95.4,66.4 h0.75 r90
  text "100K" at 101.7,62.8 h0.75 r90
  text "1K" at 95,62 h0.75 r90
  text "Designed By : DT_AR" at 116.1,50.986 h1.52